# EAGLE board gt-jtx-m16-ver1.0 (EAGLE 6.3)
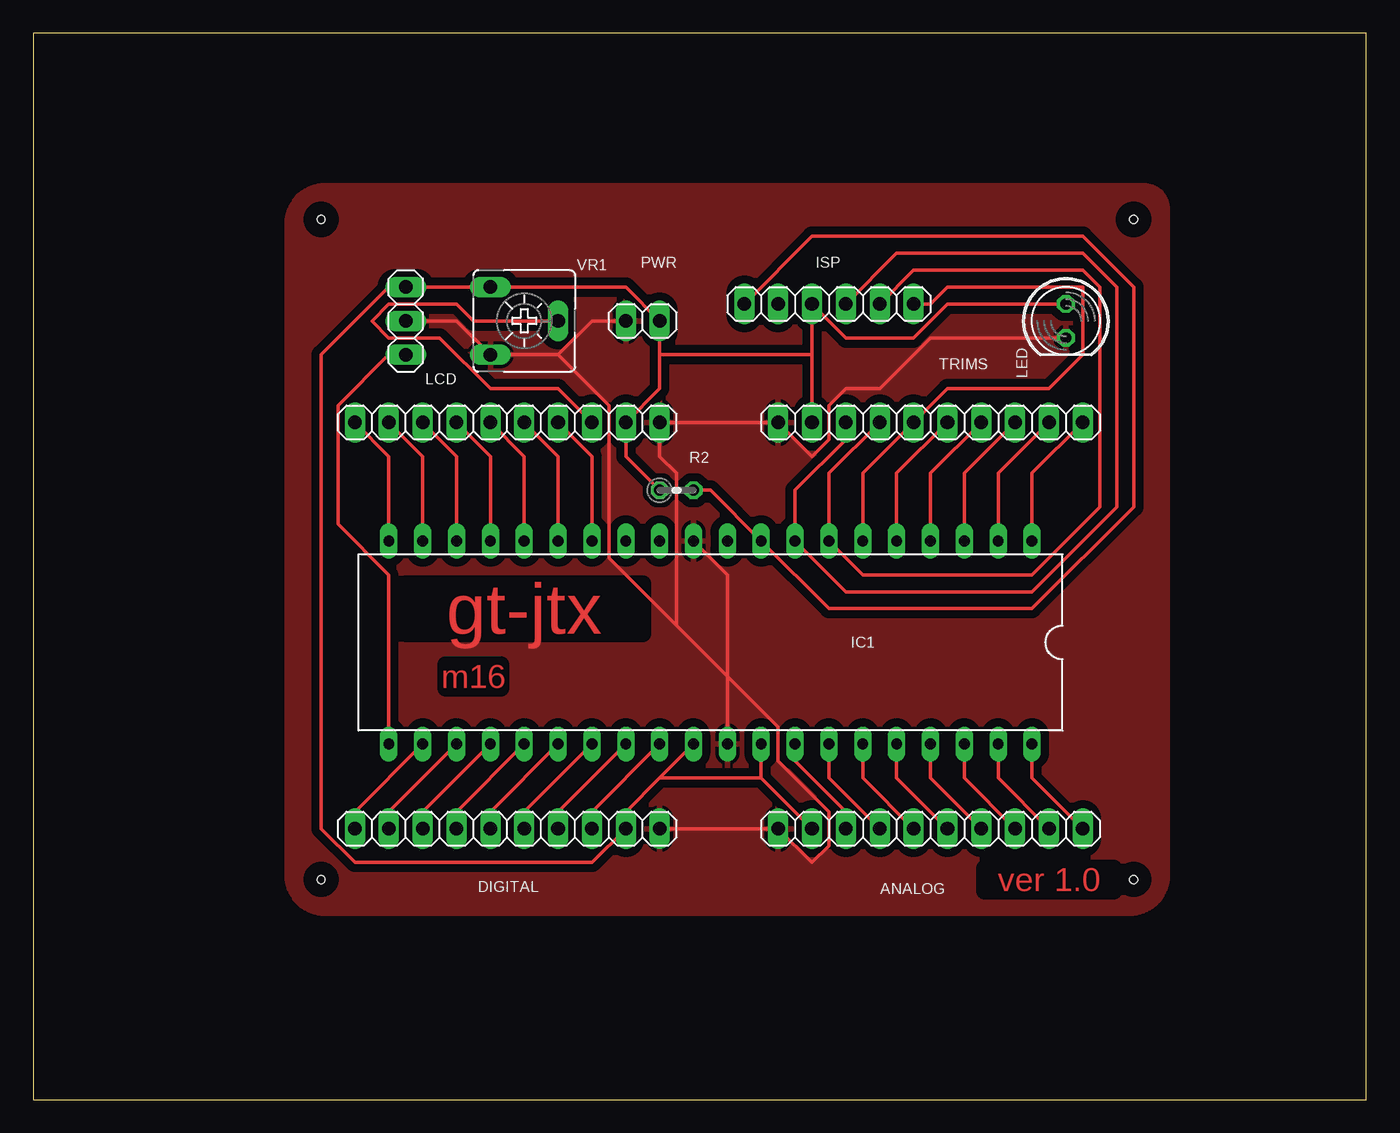
[diagram p0: board, top side]

Size 100 x 80 mm. Coordinates in mm from the lower left corner, seen from the top.
Outline: 0,0 100,0 100,80 0,80 0,0
Copper layers (1*16): Top 0.035mm / dielectric 1.5mm / Bottom 0.035mm
Design rules "default": minimum track width 10mil, minimum drill 24mil, track to track 8mil, track to pad 8mil, pad to pad 8mil, via to via 8mil, smd to smd 8mil, copper to edge 40mil, drill to drill 8mil, minimum pad ring 10mil, minimum via ring 8mil, stop-mask expansion 4mil, vias tented up to drill 0mil, thermal gap 10mil
Holes 0.6 mm at 21.59,16.51 82.55,16.51 82.55,66.04 21.59,66.04

## Footprints (pad centres in the part's own frame; a part is rotated, then mirrored left to right if it is on the bottom)
1X10 = drill 1.016 long: 1 -11.43,0; 2 -8.89,0; 3 -6.35,0; 4 -3.81,0; 5 -1.27,0; 6 1.27,0; 7 3.81,0; 8 6.35,0; 9 8.89,0; 10 11.43,0
DIL40 = drill 0.813 long: 1 -24.13,-7.62; 2 -21.59,-7.62; 3 -19.05,-7.62; 4 -16.51,-7.62; 5 -13.97,-7.62; 6 -11.43,-7.62; 7 -8.89,-7.62; 8 -6.35,-7.62; 9 -3.81,-7.62; 10 -1.27,-7.62; 11 1.27,-7.62; 12 3.81,-7.62; 13 6.35,-7.62; 14 8.89,-7.62; 15 11.43,-7.62; 16 13.97,-7.62; 17 16.51,-7.62; 18 19.05,-7.62; 19 21.59,-7.62; 20 24.13,-7.62; 21 24.13,7.62; 22 21.59,7.62; 23 19.05,7.62; 24 16.51,7.62; 25 13.97,7.62; 26 11.43,7.62; 27 8.89,7.62; 28 6.35,7.62; 29 3.81,7.62; 30 1.27,7.62; 31 -1.27,7.62; 32 -3.81,7.62; 33 -6.35,7.62; 34 -8.89,7.62; 35 -11.43,7.62; 36 -13.97,7.62; 37 -16.51,7.62; 38 -19.05,7.62; 39 -21.59,7.62; 40 -24.13,7.62
1X06 = drill 1.016 long: 1 -6.35,0; 2 -3.81,0; 3 -1.27,0; 4 1.27,0; 5 3.81,0; 6 6.35,0
LED5MM = drill 0.813 octagon: A -1.27,0; K 1.27,0
1X03 = drill 1.016 long: 1 -2.54,0; 2 0,0; 3 2.54,0
1X02 = drill 1.016 long: 1 -1.27,0; 2 1.27,0
0204V = drill 0.813 octagon: 1 -1.27,0; 2 1.27,0
CA6V = drill 1.016 long: A -2.54,-2.54; E 2.54,-2.54; S 0,2.54

## Placement (x,y rotation side)
ANALOG  [1X10]  67.31,20.32 0 top
DIGITAL  [1X10]  35.56,20.32 180 top
IC1  MEGA16-P  [DIL40]  50.8,34.29 180 top
ISP  [1X06]  59.69,59.69 0 top
LCD  [1X10]  35.56,50.8 180 top
LED  [LED5MM]  77.47,58.42 270 top
PPM  [1X03]  27.94,58.42 90 top
PWR  [1X02]  45.72,58.42 180 top
R2  [0204V]  48.26,45.72 0 top
TRIMS  [1X10]  67.31,50.8 0 top
VR1  [CA6V]  36.83,58.42 270 top

## Library data of the parts
ANALOG DIGITAL ISP LCD PPM PWR TRIMS = pinhead
IC1 = atmel; MPN: ATMEGA16-16PU; OC_FARNELL: 9171142; OC_NEWARK: 01M6885
LED = led
R2 = resistor
VR1 = pot

## Nets
+5V: ANALOG.2 DIGITAL.2 IC1.30 IC1.32 ISP.3 LCD.2 LED.A PPM.3 PWR.1 R2.1 TRIMS.2 VR1.A
GND: ANALOG.1 DIGITAL.1 IC1.11 IC1.31 LCD.1 LED.K PPM.2 PWR.2 TRIMS.1 VR1.E
N$1: ANALOG.10 IC1.40
N$2: ANALOG.9 IC1.39
N$3: ANALOG.8 IC1.38
N$4: ANALOG.7 IC1.37
N$5: IC1.20 LCD.10
N$6: IC1.19 LCD.9
N$7: IC1.18 LCD.8
N$8: ANALOG.6 IC1.36
N$9: LCD.3 VR1.S
N$10: ANALOG.5 IC1.35
N$11: ANALOG.4 IC1.34
N$12: IC1.17 LCD.7
N$13: IC1.16 LCD.6
N$14: IC1.15 LCD.5
N$15: IC1.14 LCD.4
N$16: IC1.21 PPM.1
N$17: ANALOG.3 IC1.33
N$18: DIGITAL.3 IC1.29
N$19: DIGITAL.4 IC1.28
N$20: DIGITAL.5 IC1.27
N$21: DIGITAL.6 IC1.26
N$22: DIGITAL.7 IC1.25
N$23: DIGITAL.8 IC1.24
N$24: DIGITAL.9 IC1.23
N$25: IC1.9 ISP.1 R2.2
N$26: DIGITAL.10 IC1.22
N$27: IC1.1 TRIMS.10
N$28: IC1.8 ISP.4 TRIMS.3
N$29: IC1.2 TRIMS.9
N$30: IC1.3 TRIMS.8
N$31: IC1.4 TRIMS.7
N$32: IC1.5 TRIMS.6
N$33: IC1.6 ISP.6 TRIMS.5
N$34: IC1.7 ISP.5 TRIMS.4
VCC: IC1.10

## Tracks (layer width: path | path; a pad name or v marks a point on that pad's centre or on a via)
+5V
  Top 0.254: LED.A 68.58,59.69 66.04,57.15 60.96,57.15 ISP.3 58.42,55.88 | 58.42,55.88 TRIMS.2 | 54.61,24.13 IC1.32 | ANALOG.2 54.61,24.13 | 46.99,24.13 44.45,21.59 DIGITAL.2 41.91,17.78 24.13,17.78 21.59,20.32 21.59,55.88 26.67,60.96 PPM.3 VR1.A 44.45,60.96 PWR.1 46.99,55.88 | 46.99,24.13 IC1.30 | 46.99,24.13 54.61,24.13 | R2.1 44.45,48.26 LCD.2 46.99,53.34 46.99,55.88 | 46.99,55.88 58.42,55.88
GND
  Top 0.254: LED.K 67.31,57.15 63.5,53.34 60.96,53.34 59.69,52.07 59.69,49.53 58.42,48.26 TRIMS.1 LCD.1 46.99,48.26 48.26,46.99 48.26,35.56 | PPM.2 31.75,58.42 VR1.E 39.37,55.88 | PWR.2 41.91,58.42 39.37,55.88 | DIGITAL.1 ANALOG.1 58.42,17.78 59.69,19.05 59.69,21.59 55.88,25.4 55.88,27.94 52.07,31.75 | 52.07,31.75 52.07,39.37 IC1.11 | 52.07,31.75 IC1.31 | 39.37,55.88 43.18,52.07 43.18,40.64 48.26,35.56 | 52.07,31.75 48.26,35.56
  pour Top (isolate 0.61): 82.25,13.97 21.89,13.97 arc-90 19.05,16.81 19.05,65.74 arc-90 21.89,68.58 83.29,68.58 arc-90 85.09,66.78 85.09,16.81 arc-90
N$1
  Top 0.254: IC1.40 74.93,24.13 ANALOG.10
N$2
  Top 0.254: IC1.39 72.39,24.13 ANALOG.9
N$3
  Top 0.254: IC1.38 69.85,24.13 ANALOG.8
N$4
  Top 0.254: IC1.37 67.31,24.13 ANALOG.7
N$5
  Top 0.254: IC1.20 26.67,48.26 LCD.10
N$6
  Top 0.254: IC1.19 29.21,48.26 LCD.9
N$7
  Top 0.254: IC1.18 31.75,48.26 LCD.8
N$8
  Top 0.254: IC1.36 64.77,24.13 ANALOG.6
N$9
  Top 0.254: VR1.S 33.02,58.42 31.75,59.69 26.67,59.69 25.4,58.42 26.67,57.15 30.48,57.15 34.29,53.34 39.37,53.34 LCD.3
N$10
  Top 0.254: IC1.35 62.23,24.13 ANALOG.5
N$11
  Top 0.254: IC1.34 59.69,24.13 ANALOG.4
N$12
  Top 0.254: IC1.17 34.29,48.26 LCD.7
N$13
  Top 0.254: IC1.16 36.83,48.26 LCD.6
N$14
  Top 0.254: IC1.15 39.37,48.26 LCD.5
N$15
  Top 0.254: IC1.14 41.91,48.26 LCD.4
N$16
  Top 0.254: IC1.21 26.67,39.37 22.86,43.18 22.86,52.07 26.67,55.88 PPM.1
N$17
  Top 0.254: IC1.33 57.15,25.4 60.96,21.59 ANALOG.3
N$18
  Top 0.254: IC1.29 41.91,21.59 DIGITAL.3
N$19
  Top 0.254: IC1.28 39.37,21.59 DIGITAL.4
N$20
  Top 0.254: IC1.27 36.83,21.59 DIGITAL.5
N$21
  Top 0.254: IC1.26 34.29,21.59 DIGITAL.6
N$22
  Top 0.254: IC1.25 31.75,21.59 DIGITAL.7
N$23
  Top 0.254: IC1.24 29.21,21.59 DIGITAL.8
N$24
  Top 0.254: IC1.23 26.67,21.59 DIGITAL.9
N$25
  Top 0.254: R2.2 50.8,45.72 IC1.9 59.69,36.83 74.93,36.83 82.55,44.45 82.55,60.96 78.74,64.77 58.42,64.77 ISP.1
N$26
  Top 0.254: IC1.22 24.13,21.59 DIGITAL.10
N$27
  Top 0.254: IC1.1 74.93,46.99 TRIMS.10
N$28
  Top 0.254: TRIMS.3 60.96,49.53 57.15,45.72 IC1.8 60.96,38.1 74.93,38.1 81.28,44.45 81.28,60.96 78.74,63.5 64.77,63.5 ISP.4
N$29
  Top 0.254: IC1.2 72.39,46.99 TRIMS.9
N$30
  Top 0.254: IC1.3 69.85,46.99 TRIMS.8
N$31
  Top 0.254: IC1.4 67.31,46.99 TRIMS.7
N$32
  Top 0.254: IC1.5 64.77,46.99 TRIMS.6
N$33
  Top 0.254: IC1.6 62.23,46.99 TRIMS.5 68.58,53.34 76.2,53.34 78.74,55.88 78.74,60.96 68.58,60.96 67.31,59.69 ISP.6
N$34
  Top 0.254: TRIMS.4 59.69,46.99 IC1.7 62.23,39.37 74.93,39.37 80.01,44.45 80.01,60.96 78.74,62.23 66.04,62.23 ISP.5

## Text on the board
Top: gt-jtx | m16 | ver 1.0